# Altium PCB BBeams.PcbDoc
Units mil, origin at the board's own origin, x right, y up, seen from the top; angles counter-clockwise.
Board outline 6000 x 4000 mil, 2 copper layers (Top Layer, Bottom Layer); 35 components, 24 nets, 140 pads, 29 vias.
Unrouted connection lines stored in the file: 25.
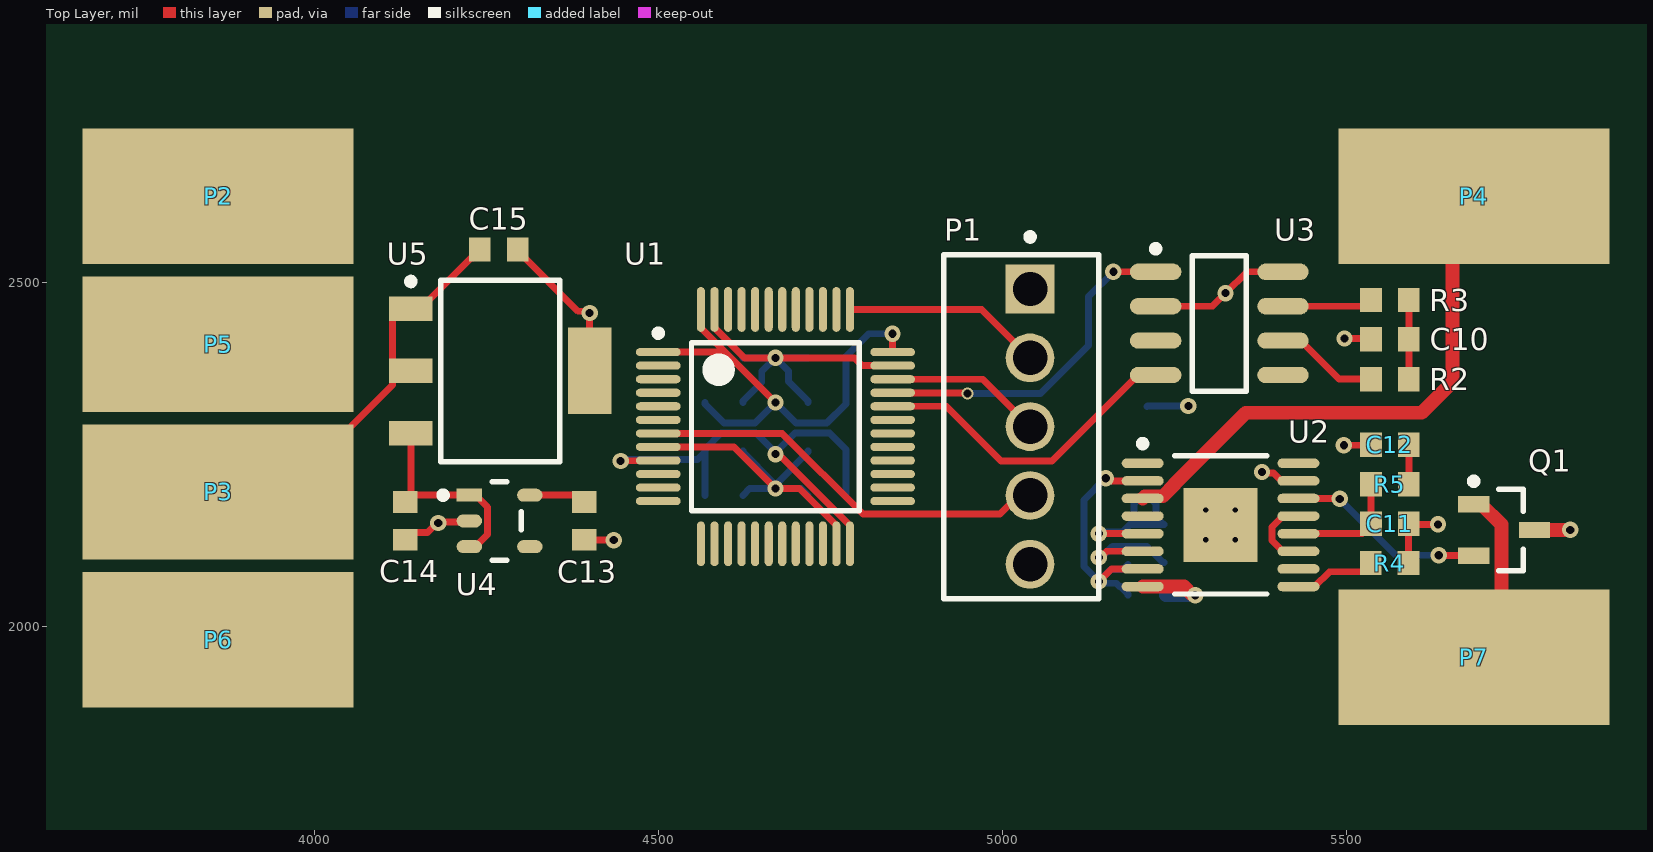
[diagram p0: Top Layer view]
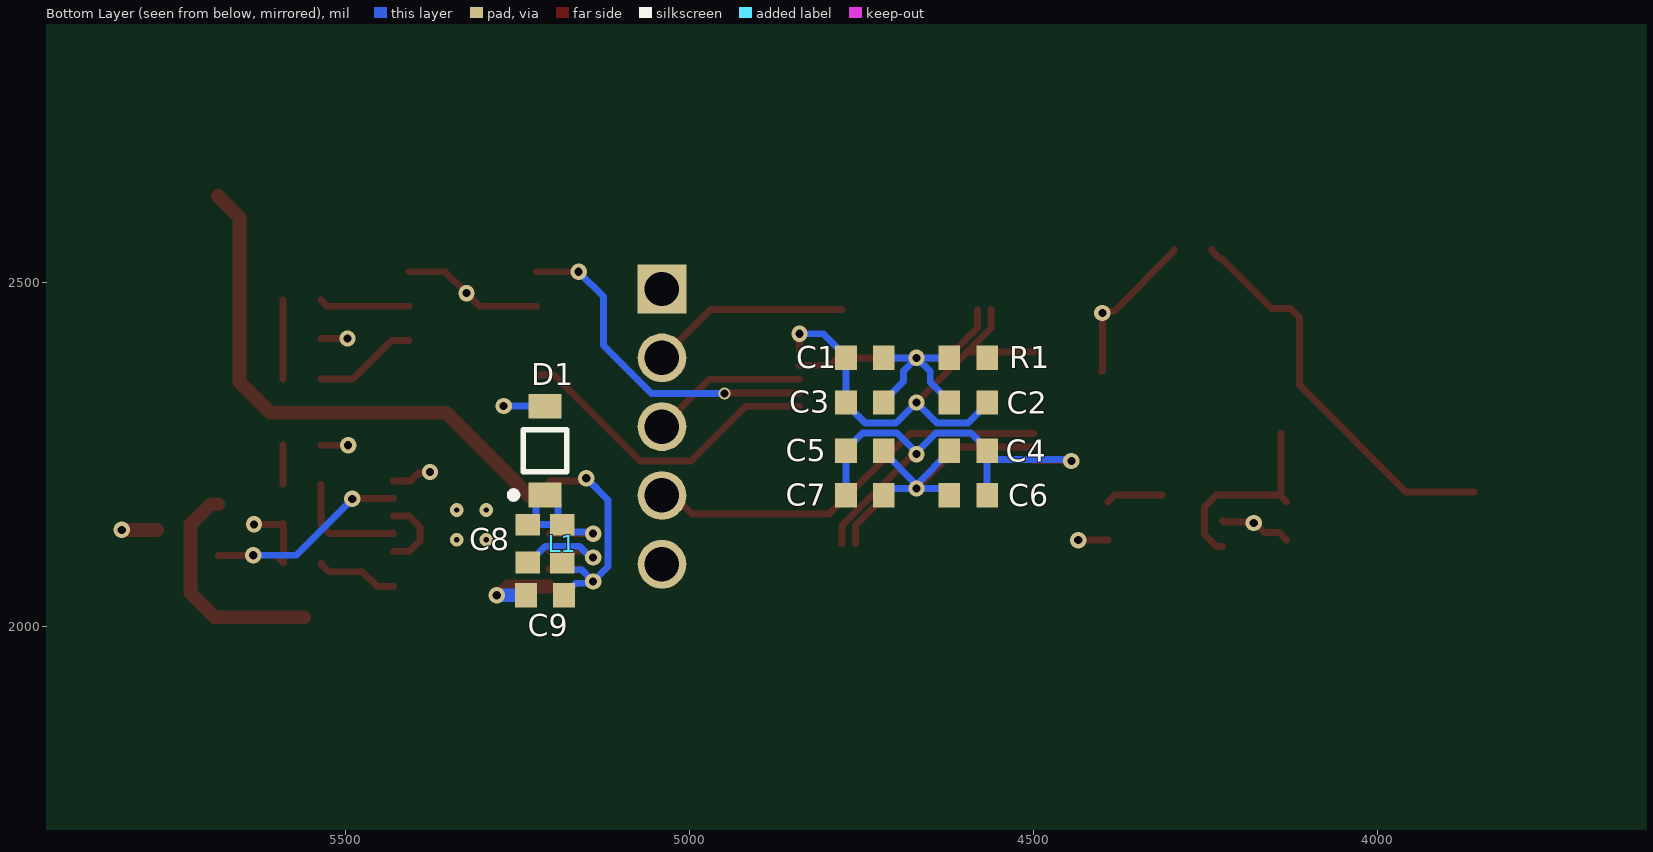
[diagram p1: Bottom Layer view, seen from below]

## Layer stack, top to bottom
Top Solder: solder mask 0.4, Solder Resist, Dk 3.5
Top Layer: signal copper 1.4
Dielectric 1: dielectric 12.6, FR-4, Dk 4.8
Bottom Layer: signal copper 1.4
Bottom Solder: solder mask 0.4, Solder Resist, Dk 3.5

## Board outline
1000,1000 7000,1000 7000,5000 1000,5000

## Design rules (kind name [scope] priority, off if disabled: settings)
Clearance [All] p1: gap=10 ignorepadtopadclearanceinfootprint=TRUE except(0: Arc-Hole Track-Hole SMDPad-Hole THPad-Hole Via-Hole Fill-Hole Poly-Hole Region-Hole Text-Hole; 3: Arc-SMDPad Track-SMDPad SMDPad-SMDPad; 3.5: Arc-Arc Arc-Track Track-Track; 5: Arc-THPad Arc-Via Track-THPad Track-Via)
HoleSize [All] p1: absolutevalues=TRUE maxlimit=248.03 minlimit=11.81 maxpercent=80.000 minpercent=20.000
MinimumAnnularRing [IsVia] p1: minimumring=3
PolygonConnect [All] p1: connectstyle=Relief reliefconductorwidth=10 reliefentries=4 polygonreliefangle="90 Angle" airgapwidth=10
RoutingVias [All] p1: holewidth=11.81 width=17.72 viastyle="Through Hole" minholewidth=11.81 minwidth=17.72 maxholewidth=248.03 maxwidth=39.37
SolderMaskExpansion [All] p1: expansion=4
Width [All] p1: maxlimit=30 minlimit=10 preferedwidth=10 minimp=50.000000 maximp=50.000000 favimp=50.000000
29 further rules are at their usual default settings.

## Components (designator, comment, footprint, x,y, rotation, side; value= is the part's Value field where it differs from the comment)
C1 "Cap Semi" 1608[0603] 4745,2390 r0 bottom value=100nF
C2 "Cap Semi" 1608[0603] 4595,2325 r180 bottom value=100nF
C3 "Cap Semi" 1608[0603] 4745,2325 r0 bottom value=4.7uF
C4 "Cap Semi" 1608[0603] 4595,2255 r180 bottom value=100nF
C5 "Cap Semi" 1608[0603] 4745,2255 r0 bottom value=4.7uF
C6 "Cap Semi" 1608[0603] 4595,2190 r180 bottom value=10nF
C7 "Cap Semi" 1608[0603] 4745,2190 r0 bottom value=1uF
C8 "Cap Semi" 1608[0603] 5235,2120 r270 bottom value=0.22uF
C9 "Cap Semi" 1608[0603] 5210,2045 r0 bottom value=2.2uF
C10 "Cap Semi" 1608[0603] 5563,2417 r0 top value=4700pF
C11 "Cap Semi" 1608[0603] 5563,2149 r180 top value=3.3nF
C12 "Cap Semi" 1608[0603] 5563,2263.51 r0 top value=0.1uF
C13 "Cap Semi" 1608[0603] 4392,2153 r90 top value=1uF
C14 "Cap Semi" 1608[0603] 4132,2153 r90 top value=22uF
C15 "Cap Semi" 1608[0603] 4268,2547.35 r180 top value=1uF
D1 "MBR0520L" ONSC-SOD-123-2-425-04_V 5210,2255 r90 bottom
L1 "Inductor" 1608[0603] 5185,2120 r270 bottom value=10uH
P1 "640456-5" TECO-640456-5 5040,2290 r90 top
P2 "I/O Pad" "I/O PAD" 3860,2625 r0 top
P3 "I/O Pad" "I/O PAD" 3860,2195 r0 top
P4 "I/O Pad" "I/O PAD" 5685,2625 r0 top
P5 "I/O Pad" "I/O PAD" 3860,2410 r0 top
P6 "I/O Pad" "I/O PAD" 3860,1980 r0 top
P7 "I/O Pad" "I/O PAD" 5685,1955 r0 top
Q1 "MOSFET-N" SOT-23_N 5729.04,2139.75 r0 top
R1 "Res1" 1608[0603] 4595,2390 r0 bottom value=10k
R2 "Res1" 1608[0603] 5563,2359 r0 top value=60
R3 "Res1" 1608[0603] 5563,2474 r180 top value=60
R4 "Res1" 1608[0603] 5562.44,2091.75 r180 top value=80.6k
R5 "Res1" 1608[0603] 5563,2206.25 r180 top value=10k
U1 "STM32F042C4T6" STM-LQFP48_M 4670,2290 r0 top
U2 "LT3474EFE#PBF" LT-FE-16-EPV-BA_N 5316.81,2147.2 r0 top
U3 "MCP2561-E/SN" SO8_L 5315,2440 r0 top
U4 "NCP718ASN330T1G" FP-419AE-01-IPC_C 4269,2153 r0 top
U5 "TLE4266G" INF-PG-SOT223_SC-73_N 4270.08,2371 r0 top

## Footprints (in the part's own frame and the unit in brackets; to place one, negate y for a bottom-side part, rotate by r counter-clockwise, add the part's x,y. Pads: shape width x height; smd on the part's side, far side on the other; paste and mask are expansions set on the pad)
1608[0603] [mm] "Chip Capacitor, Body 1.6x0.8mm, IPC High Density"
  rect 0.8x0.9 smd: 1(-0.7,0) 2(0.7,0)
  body extent -0.87,-0.48 0.87,0.48, height 1.3
FP-419AE-01-IPC_C [mm]
  rect 0.94x0.486 smd paste+0 mask+0: 1(-1.115,0.95)
  rrect100% 0.94x0.486 smd paste+0 mask+0: 2(-1.115,0) 3(-1.115,-0.95) 4(1.116,-0.95) 5(1.116,0.95)
  silkscreen extent -2.21,-1.45 0.8,1.45, body extent -1.69,-1.55 1.69,1.55, height 0.25
"I/O PAD" [mm] "Basic rectangular point for soldering high current I/O"
  rect 10x5 smd: 1(0,0)
INF-PG-SOT223_SC-73_N [mm] "SOT223, 4-Leads, Body 6.5x3.5mm, Pitch 2.3mm, IPC Medium Density"
  rect 1.6x0.9 smd: 1(-3.3,2.3) 2(-3.3,0) 3(-3.3,-2.3)
  rect 1.6x3.2 smd: 4(3.3,0)
  silkscreen extent -3.42,-3.35 2.2,3.42, body extent -1.85,-3.35 1.85,3.35, height 1.8
LT-FE-16-EPV-BA_N [mm] "SOP, 16-Leads, Body 5x4.4mm, Pitch 0.65mm, Thermal Pad 2.74x2.74mm, IPC Medium Density"
  oval 1.55x0.35 smd: 1(-2.875,2.275) 2(-2.875,1.625) 3(-2.875,0.975) 4(-2.875,0.325) 5(-2.875,-0.325) 6(-2.875,-0.975) 7(-2.875,-1.625) 8(-2.875,-2.275) 9(2.875,-2.275) 10(2.875,-1.625) 11(2.875,-0.975) 12(2.875,-0.325) 13(2.875,0.325) 14(2.875,0.975) 15(2.875,1.625) 16(2.875,2.275)
  rect 2.74x2.74 smd: 17(0,0)
  silkscreen extent -3,-2.55 1.7,3.12, body extent -2.25,-2.55 2.25,2.55, height 1.1
ONSC-SOD-123-2-425-04_V [mm] "SOD, 2-Leads, Body 2.69x1.6mm"
  rect 0.91x1.22 smd: 1(-1.635,0) 2(1.635,0)
  silkscreen extent -1.76,-0.8 0.78,1.29, body extent -1.35,-0.8 1.35,0.8, height 1.35
SO8_L [mm] "SOIC, 8-Leads, Body 4.9x3.9mm, Pitch 1.27mm, IPC High Density"
  oval 1.9x0.6 smd: 1(-2.35,1.905) 2(-2.35,0.635) 3(-2.35,-0.635) 4(-2.35,-1.905) 5(2.35,-1.905) 6(2.35,-0.635) 7(2.35,0.635) 8(2.35,1.905)
  silkscreen extent -2.47,-2.5 1,2.88, body extent -2,-2.5 2,2.5, height 1.75
SOT-23_N [mm] "SOT23, 3-Leads, Body 2.9x1.3mm, Pitch 0.95mm, Lead Span 2.5mm, IPC Medium Density"
  rect 1.15x0.6 smd: 1(-1.125,0.95) 2(-1.125,-0.95) 3(1.125,0)
  silkscreen extent -1.25,-1.5 0.7,1.92, body extent -0.7,-1.5 0.7,1.5, height 1.1
STM-LQFP48_M [mm] "QFP, 48-Leads, Body 7x7mm, Pitch 0.5mm, IPC Low Density"
  oval 1.65x0.3 smd: 1(-4.325,2.75) 2(-4.325,2.25) 3(-4.325,1.75) 4(-4.325,1.25) 5(-4.325,0.75) 6(-4.325,0.25) 7(-4.325,-0.25) 8(-4.325,-0.75) 9(-4.325,-1.25) 10(-4.325,-1.75) 11(-4.325,-2.25) 12(-4.325,-2.75) 25(4.325,-2.75) 26(4.325,-2.25) 27(4.325,-1.75) 28(4.325,-1.25) 29(4.325,-0.75) 30(4.325,-0.25) 31(4.325,0.25) 32(4.325,0.75) 33(4.325,1.25) 34(4.325,1.75) 35(4.325,2.25) 36(4.325,2.75)
  oval 0.3x1.65 smd: 13(-2.75,-4.325) 14(-2.25,-4.325) 15(-1.75,-4.325) 16(-1.25,-4.325) 17(-0.75,-4.325) 18(-0.25,-4.325) 19(0.25,-4.325) 20(0.75,-4.325) 21(1.25,-4.325) 22(1.75,-4.325) 23(2.25,-4.325) 24(2.75,-4.325) 37(2.75,4.325) 38(2.25,4.325) 39(1.75,4.325) 40(1.25,4.325) 41(0.75,4.325) 42(0.25,4.325) 43(-0.25,4.325) 44(-0.75,4.325) 45(-1.25,4.325) 46(-1.75,4.325) 47(-2.25,4.325) 48(-2.75,4.325)
  silkscreen extent -4.45,-3.1 3.1,3.57, body extent -3.5,-3.5 3.5,3.5, height 1.6
TECO-640456-5 [mm] "Through Hole, 5-Leads, Body 12.7x5.72mm, Pitch 2.54mm"
  rect 1.8x1.8 hole 1.27 paste+0: 1(5.08,0)
  round 1.8 hole 1.27 paste+0: 2(2.54,0) 3(0,0) 4(-2.54,0) 5(-5.08,0)
  silkscreen extent -6.35,-2.54 7.13,3.18, body extent -6.35,-2.67 6.35,3.18, height 10.29

## Part data
C1 C2 C3 C4 C5 C6 C7 C8 C9 C10 C11 C12 C13 C14 C15: "Capacitor (Semiconductor SIM Model)", LatestRevisionDate=29-May-2009, LatestRevisionNote="IPC-7351 Footprint Added.", PackageDescription="Chip Capacitor", PackageReference=C1206, Published=8-Jun-2000, Publisher="Altium Limited"
D1: library part CMP-2000-04926-1, "Schottky Diode, 20V, 0.2A, 2-pin SOD-123, RoHS, Tape and Reel", Manufacturer=FairchildSemiconductor, Operating Temperature=-65to125degC, Package=2SOD-123, Package Description="2-Pin Small Outline Diode, Body 2.69 x 1.6 mm", Package Reference=SOD-123-2-425-04, Peak Average Forward Current=0.5A, Peak Forward Voltage=0.385V, Peak Non-Repetitive Surge Current=5.5A, Peak Reverse Current=250uA, Peak Reverse Repetitive Voltage=20V, Category=Rectifier, Configuration=Single, Datasheet URL=https://datasheet.ciiva.com/5739/1684450-5739282.pdf, Datasheet Version="Rev. C0, 03/2012", Manufacturer URL=https://www.fairchildsemi.com/, Mounting=SurfaceMount, Packaging=Tape&Reel, Rad Hard=No, Type=SchottkyDiode
P1: library part CMP-1684-00014-1, "Male Header, Pitch 2.54 mm, 1 x 5 Position, Height 10.03 mm, Tail Length 3.56 mm,  / -55 to 105 degC, RoHS, Bulk", Color=White, Current, Rating="5 /  / A", Flammability Rating=UL94V-0, Manufacturer="TE Connectivity", Package Description="Male Header, Pitch 2.54 mm, 1 x 5 Position, Height 10.03 mm, Tail Length 3.56 mm", Package Reference=THD, Temperature, Operating="-55to+105 /  / °C", Voltage, Rating="250 /  / V", Agency Approvals=CSA,UL, Angle=Straight, Brand/Series=MTA-100Series, Color, Housing=White, Connector Type=MTA-100, Contact Centerline Spacing="0.100 /  / in.", Contact Mating Area Plating=Tin, Contact Plating=Tin, Contact Shape=Square, Contact Termination Area Plating=Tin, Datasheet URL=http://sigma.octopart.com/77881742/technical_drawing/TE-Connectivity-640456-5.pdf, Datasheet Version="Rev. W3", Length, Overall="0.5 /  / \"", Length, Pin="0.14 /  / \"", Length, Terminal Post="0.14 /  / in.", Manufacturer URL=http://www.te.com, Material, Contact=CopperAlloy, Material, Housing=Polyester, Mount Angle=Vertical, Mounting Hole Size="0.04 /  / \"", Mounting Type=PCMount, Number of Contacts=5, Number of Positions=5, Number of Rows=1, Pin Spacing="0.1 /  / \"", Primary Type=InterconnectSystem, Size, Post="0.025 /  / in.", Special Features=Pinstrip, Standards=RoHSCompliant,ELVCompliant,UL94V-0, Termination=Solder, Type=PCBPlug
Q1: "N-Channel MOSFET", LatestRevisionDate=17-Jul-2002, LatestRevisionNote="Re-released for DXP Platform.", PackageDescription="TO, Flat Index; 3 In-Line, Axial Leads; Body Dia. 4.6mm; Lead Dia. 0.5 mm (max)", PackageReference=E3, PackageVersion=1995/1996, Published=8-Jun-2000, Publisher="Altium Limited"
R1 R2 R3 R4 R5: "Resistor", LatestRevisionDate=17-Jul-2002, LatestRevisionNote="Re-released for DXP Platform.", PackageDescription="Axial Device, Thru-Hole; 2 Leads; 0.3 in Pin Spacing", PackageReference=AXIAL-0.3, Published=8-Jun-2000, Publisher="Altium Limited"
U1: library part CMP-0304-00102-2, "ARM Cortex-M0 32-bit MCU, 16 KB Flash, 6 KB Internal RAM, 38 I/Os, 48-Pin LQFP, -40 to 85 degC, Tray", I/Os (High Current)=38, Manufacturer=STMicroelectronics, Operating Frequency(F) (Processor speed) (MHz)=48, Package Description="48-Pin Low Profile Quad Flat Package, Body 7 x 7 mm, Pitch 0.5 mm", Package Reference=LQFP48, Supply Voltage(Vcc) min (V)=2, ComponentLink1Description="Manufacturer URL", ComponentLink1URL=http://www.st.com/, ComponentLink2Description=Datasheet, ComponentLink2URL=http://www.st.com/st-web-ui/static/active/en/resource/technical/document/datasheet/DM00105814.pdf, Core="ARM Cortex-M0", DatasheetVersion="Rev. 5", FLASH Size (Prog) (kB)=16, Internal RAM Size (kB)=6, Mounting Technology="Surface Mount", Packing=Tray, PartNumber=STM32F042C4T6
U2: library part CMP-0477-00086-1, "Step-Down 1 A LED Driver with Open Circuit Protection, 4 to 36 V Vin, 15 V Vout MAX, 16-pin SOP (FE-16-EPV-BA), -40 to 85 degC, Pb-Free", Manufacturer="Linear Technology", ComponentLink1Description="Manufacturer URL", ComponentLink1URL=http://www.linear.com/, ComponentLink2Description=Datasheet, ComponentLink2URL=http://cds.linear.com/docs/en/datasheet/3474fd.pdf, ComponentLink3Description="Package Specification", ComponentLink3URL=http://cds.linear.com/docs/en/packaging/05081663_J_FE16(BA).pdf, DatasheetVersion="Rev. D", Mounting Technology="Surface Mount", PackageDescription="16-Pin Plastic TSSOP, Body 5 x 4.4 mm, Pitch 0.65 mm", PackageReference=FE-16, PackageVersion="Rev. I, 05/2011", PartNumber=LT3474EFE#PBF, RoHS=TRUE, Topology="Buck, LED Driver", Vin Min(V)=4
U4: library part CMP-07128-000009-1, "300 MA LOW IQ WIDE INPUT", Dropout Voltage=275mV, Manufacturer="ON Semiconductor", Max Junction Temp=+150°C, Max Supply Voltage=24V, Min Supply Voltage=2.5V, Nominal Supply Current=4uA, Output Current=800mA, Output Voltage=3.3V, Package=419AE-01, Temperature="to +150°C", Accuracy Percentage=2%, Automotive=No, Category=IC, ComponentLink2Description=Datasheet, ComponentLink2URL=https://www.onsemi.com/pub/Collateral/NCP718-D.PDF, Device Class L1="Integrated Circuits (ICs)", Device Class L2="Power Management ICs", Device Class L3="Voltage Regulators - Linear", Digikey Description="300 MA LOW IQ WIDE INPUT", Footprint Url=https://www.onsemi.com/pub/Collateral/419AE.PDF, Height=1mm, Ipc Land Pattern Name=SOT95P280X100-5, Lead Free=Yes, Manufacturer Part Number=NCP718ASN330T1G, Mouser Description="LDO Regulator, 300 mA, Wide Vin, Ultra-Low Iq Fixed 3.3V, Active Discharge, TSOT23-5", Number Of Outputs=1, Octopart=https://octopart.com/ncp718asn330t1g-on+semiconductor-87658778, Output Type=Fixed, RoHS=TRUE, Standoff Height=0.01mm, Temperature Range High=+150°C
U5: library part CMP-1109-00078-1, "5 V Low Drop Voltage Regulator, 5.5 to 45 V Supply, -40 to 150 degC, PG-SOT223 (SC-73), Reel, Green", Dropout Voltage="250 mV", Manufacturer=Infineon, Max. Output Current="100 mA", Operating Range="5.5 to 45 V", Output Voltage=5V, Typical Quiescent Current="300 uA", Accuracy="2 %", ComponentLink1Description="Manufacturer URL", ComponentLink1URL=http://www.infineon.com/, ComponentLink2Description=Datasheet, ComponentLink2URL=http://www.infineon.com/dgdl/TLE4266_DS_25%5B1%5D.pdf?folderId=db3a30431be39b97011c1dfc76d7781d&fileId=db3a30431be39b97011c1dfda483781e&location=en.Products.Automotive_ICs.Linear_Voltage_Regulators_for_Automotive-Applications.Linear_Voltage_Regulators_-_Se, ComponentLink3Description="Package Specification", ComponentLink3URL=http://www.infineon.com/dgdl/SOT223-Package_Overview.pdf?folderId=db3a30431936bc4b0119530470b03c3d&fileId=db3a30431936bc4b0119531d40b93c5c, DatasheetVersion="Rev. 2.5", Green=TRUE, Mounting Technology="Surface Mount", PackageDescription="4-Pin Small Outline Transistor Package, 6.5 x 3.5 mm Body, 2.3 mm Pitch", PackageReference="PG-SOT223 (SC-73)", PackageVersion=Apr-08, Packing=Reel, PartNumber=TLE4266G, Regulator Type="single output"
L1: Code_IEC=1005, Code_JEITA=0402, LatestRevisionDate=29-May-2009, LatestRevisionNote="IPC-7351 Footprint Added.", PackageDescription="Chip Inductor", PackageReference=0402-A, Published=8-Jun-2000, Publisher="Altium Limited"

## Via types
v1: diameter 23.62, hole 11.81, Top Layer to Bottom Layer, 24 vias
v2: diameter 19.68, hole 7.87, Top Layer to Bottom Layer, 4 vias
v3: diameter 17.72, hole 11.81, Top Layer to Bottom Layer, 1 vias

## Nets (pads, with @x,y where several pads share a name; then routed paths per layer and width w, separated by ;. In a path a pad name is that pad's centre, name@x,y a point inside that pad or via, vN(x,y) a via of type N, cw(c..) or ccw(c..) an arc to the next point about the centre after c; other vN are vias at no path point)
+3.3V: C1.2 C2.2 C3.2 C4.2 C5.2 C6.2 C7.2 C13.2 P1.1 U1.1 U1.9 U1.24 U1.36 U1.48 U4.5 | length 1536.3
  Top Layer w10: U4.5 4382.16,2190.4 C13.2 ; v1(4445,2240) 4445.44,2240.44 4499.38,2240.44 U1.9 ; U1.1@4499.86,2398.13 U1.1 4596.73,2398.27 ; U1.48@4561.39,2459.93 U1.48 4561.73,2433.27 4596.73,2398.27 ; v1(4670,2250) 4672.61,2247.39 4677.17,2247.39 4778.27,2146.3 U1.24 ; v1(4670,2325) 4596.73,2398.27 ; v1(4840,2425) 4840,2398.54 U1.36
  Bottom Layer w10: v1(4445,2240) 4447.28,2242.28 4556.69,2242.28 4567.44,2253.03 C6.2 ; C4.2 4567.44,2256.97 4591.19,2280.72 4641.62,2280.72 v1@4670,2252.34 ; C2.2 4567.44,2323.03 4595.47,2295 4640,2295 v1(4670,2325) 4700,2295 4744.53,2295 4772.56,2323.03 C3.2 C1.2 4772.56,2391.97 4805.59,2425 v1(4840,2425) ; v1(4670,2250) v1@4670,2252.34 ; C7.2 C5.2 4772.56,2256.97 4748.81,2280.72 4698.38,2280.72 v1@4670,2252.34
+5V: C14.2 U3.3 U4.1 U4.3 U5.3 | length 296.1
  Top Layer w10: C14.2 C14.2@4140.16,2188.72 ; U5.3 C14.2@4140.16,2188.72 ; U4.3 4234.02,2115.6 4251.58,2133.16 4251.58,2172.84 4234.02,2190.4 U4.1 4141.84,2190.4 C14.2@4140.16,2188.72
+15V: C15.2 P3.1 U2.4 U5.1 U5.2 | length 585.3
  Top Layer w10: P3.1 3958.43,2195 4113.66,2350.24 4113.66,2448.83 4126.38,2461.55 U5.1 4153.94,2461.55 4227.02,2534.63 4229.69,2534.63 4240.44,2545.38 C15.2
CAN_RX: U1.32 U3.4 | length 466.9
  Top Layer w10: U1.32 4918.41,2319.53 4997.93,2240 5071.89,2240 5196.89,2365 U3.4
CAN_TX: U1.33 U3.1 | length 497.6
  Top Layer w10: U1.33 4840.62,2338.87 4948.13,2338.87 v3(4949,2338) ; v1(5161,2515) U3.1
  Bottom Layer w10: v3(4949,2338) 5055,2338 5125,2408 5125,2479 v1(5161,2515)
CANH: P2.1 R2.1 U3.6 | length 151.1
  Top Layer w10: U3.6 5433.11,2415 5489.11,2359 R2.1
CANL: P5.1 R3.2 U3.7 | length 131.6
  Top Layer w10: U3.7 5526.44,2465 R3.2
GND: C1.1 C2.1 C3.1 C4.1 C5.1 C6.1 C7.1 C9.2 C10.1 C11.1 C12.1 C13.1 C14.1 C15.1 D1.2 P1.5 P6.1 Q1.3 R1.2 R4.1 U1.8 U1.23 U1.35 U1.47 U2.8 U2.15 U2.17 U3.2 U3.8 U4.2 U5.4 | length 2244.7
  Top Layer w10: C14.1 4142.75,2136.19 4164.1,2136.19 4177.91,2150 v1(4180,2150) 4181.48,2151.48 4223.56,2151.48 U4.2 ; C15.1 4295.56,2545.38 4383.33,2457.61 4397.39,2457.61 v1(4400,2455) U5.4 U5.4@4401,2370 ; C13.1 4434.56,2125.44 v1(4435,2125) ; U1.8 4609.53,2260.47 v1(4670,2200) 4704.88,2200 4758.58,2146.3 U1.23 ; U1.47 4581.42,2433.7 4625.12,2390 v1(4670,2390) 4785,2390 4796.07,2378.93 4839.93,2378.93 U1.35 U1.35@4840.62,2378.93 ; P1.5 P1.5@5046.6,2090 ; U3.2 5305,2465 v1(5324,2484) 5355,2515 U3.8 ; v1@5276.31,2045 v1(5280,2045) ; v1(5377,2224) 5378.48,2222.52 5394.01,2222.52 5405.36,2211.18 U2.15 ; v1(5496,2263) 5534.93,2263 C12.1 ; v1(5497,2418) 5534.44,2418 C10.1 ; R4.1@5599.25,2101 R4.1 5590,2146.47 5590.56,2147.03 C11.1 5591.56,2148 v1(5633,2148) ; Q1.3@5772.83,2139.25 Q1.3
  Top Layer w20: U2.8 5263.68,2057.64 v1@5276.31,2045 ; Q1.3 5824.75,2139.75 v1(5825,2140)
  Bottom Layer w10: C6.1 4632.56,2200 v1(4670,2200) ; C4.1 4622.56,2253.03 4667.39,2208.2 4667.39,2202.61 v1(4670,2200) ; C2.1 4622.56,2326.97 4650,2354.41 4650,2370 v1(4670,2390) ; R1.2 v1(4670,2390) ; C7.1 4707.44,2200 v1(4670,2200) ; C5.1 4717.44,2253.03 4672.61,2208.2 4672.61,2202.61 v1(4670,2200) ; C3.1 4717.44,2326.97 4688.96,2355.45 4688.96,2371.04 v1(4670,2390) ; C1.1 v1(4670,2390) ; D1.2 5210.63,2320 v1(5270,2320) ; v1(5377,2224) 5377,2222 5378,2221 5378,2225 v1@5380,2227
  Bottom Layer w20: C9.2 v1(5280,2045)
  other v2: 5295.16,2125.55 5338.46,2125.55 5295.16,2168.86 5338.46,2168.86
LED_OUT: P4.1 U2.3 | length 803.9
  Top Layer w20: U2.3 5206.73,2188.7 5232.89,2188.7 5249.87,2205.68 5249.87,2206.53 5353.35,2310 5609,2310 5654,2355 5654,2594 P4.1
LED_RET: P7.1 Q1.1 | length 331.6
  Top Layer w20: P7.1@5560,2013.11 5690.07,2013.11 5725,2048.04 5725,2147.73 5695.58,2177.15 Q1.1
NetC8_1: C8.1 D1.1 L1.1 U2.5 | length 274.2
  Top Layer w10: v1(5140,2134.41) 5140.3,2134.7 5203.33,2134.7 U2.5
  Bottom Layer w10: v1(5140,2134.41) 5142.4,2136.81 5174.25,2136.81 L1.1 ; C8.1 C8.1@5233.66,2147.56 ; L1.1 5190.98,2153.54 5190.98,2177.72 5203.9,2190.63 D1.1 5222.91,2177.72 5222.91,2158.31 C8.1@5233.66,2147.56 ; L1.1 C8.1@5233.66,2147.56
NetC8_2: C8.2 U2.6 | length 178.8
  Top Layer w10: v1@5140,2100 5142.09,2100 5150.91,2108.82 U2.6
  Bottom Layer w10: v1@5140,2100 5143.98,2100 5160.17,2116.19 5209.28,2116.19 5233.03,2092.44 C8.2
  other v1: 5140,2099.7
NetC9_1: C9.1 L1.2 U2.2 U2.7 | length 403.2
  Top Layer w10: v1(5140,2065) 5158.11,2083.11 5203.5,2083.11 U2.7 ; v1(5150,2215) 5153.69,2215 5157.51,2211.18 U2.2
  Bottom Layer w10: v1(5150,2215) 5118.19,2183.19 5118.19,2086.81 v1(5140,2065) ; C9.1 5182.44,2046.97 5171.69,2057.72 5169.72,2057.72 5165.05,2062.39 5142.61,2062.39 v1(5140,2065) ; L1.2@5182.44,2089.88 5174.64,2082.08 5157.08,2082.08 v1(5140,2065)
NetC10_2: C10.2 R2.2 R3.1 | length 115
  Top Layer w10: R2.2 C10.2 R3.1
NetC11_2: C11.2 R5.2 U2.12 | length 170.9
  Top Layer w10: U2.12@5430.72,2135.13 U2.12 5522.82,2134.41 5535.44,2147.03 C11.2 R5.2
NetC12_2: C12.2 R5.1 | length 57.3
  Top Layer w10: R5.1 C12.2
NetR1_1: R1.1 U1.44
NetR4_2: R4.2 U2.9 | length 120.2
  Top Layer w10: U2.9 5453.62,2057.64 5475.01,2079.03 5524.13,2079.03 5534.88,2089.78 R4.2
NetU2_11: U2.11 U2.13 | length 109.6
  Top Layer w10: U2.11 5407.4,2108.82 5391.49,2124.73 5391.49,2144.09 5407.4,2160 U2.13
PWM_DIM: Q1.2 U1.15 U2.14 | length 289.2
  Top Layer w10: U2.14 5430.3,2185.3 5489.7,2185.3 v1(5490,2185) ; v1(5634,2103) 5634.33,2102.67 5684.42,2102.67 Q1.2
  Bottom Layer w10: v1(5490,2185) 5572,2103 v1(5634,2103)
RESET: P1.4 U1.7 | length 600
  Top Layer w10: U1.7 4679.84,2280.16 4797,2163 4996.53,2163 5023.53,2190 P1.4
SHDN: U1.46 U2.10
SWCLK: P1.2 U1.37 | length 290.8
  Top Layer w10: U1.37 4969.72,2460.28 P1.2
SWDIO: P1.3 U1.34 | length 228.3
  Top Layer w10: U1.34 4971.1,2358.9 P1.3
pads on no net: U1.2 U1.3 U1.4 U1.5 U1.6 U1.10 U1.11 U1.12 U1.13 U1.14 U1.16 U1.17 U1.18 U1.19 U1.20 U1.21 U1.22 U1.25 U1.26 U1.27 U1.28 U1.29 U1.30 U1.31 U1.38 U1.39 U1.40 U1.41 U1.42 U1.43 U1.45 U2.1 U2.16 U3.5 U4.4